# Altium PCB pcb_out.PcbDoc
Units mil, origin at the board's own origin, x right, y up, seen from the top; angles counter-clockwise.
Board outline 4251.97 x 2480.32 mil, 2 copper layers (Top Layer, Bottom Layer); 14 components, 14 nets, 56 pads, 0 vias.
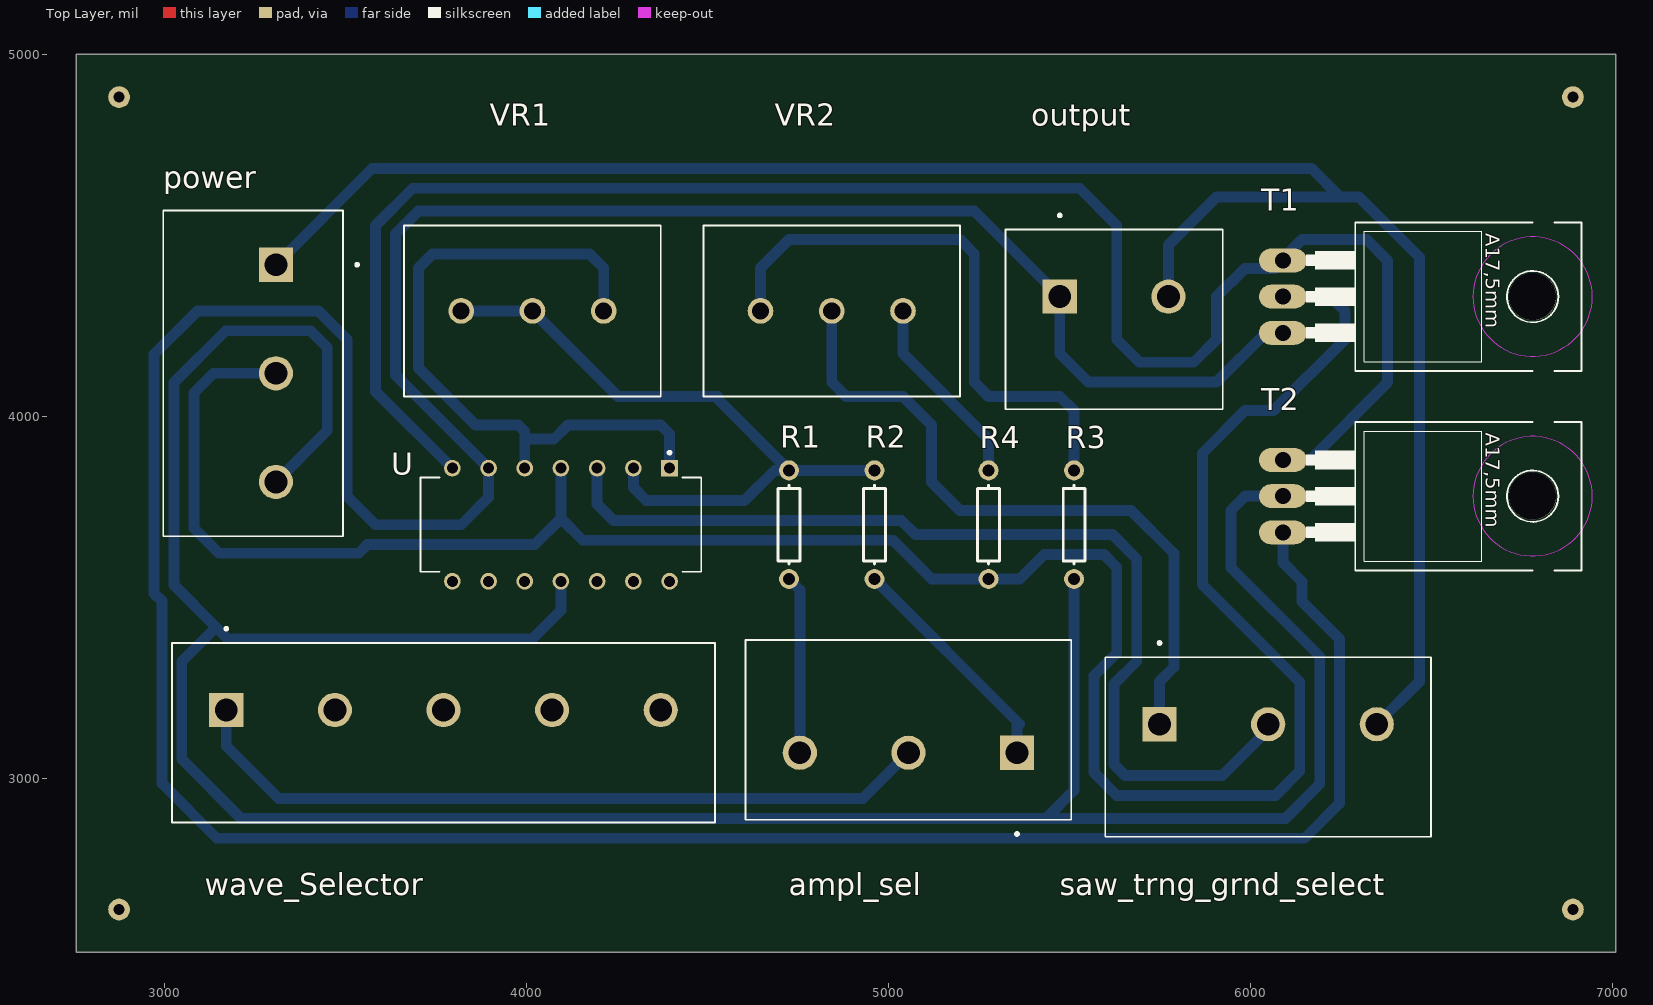
[diagram p0: Top Layer view]
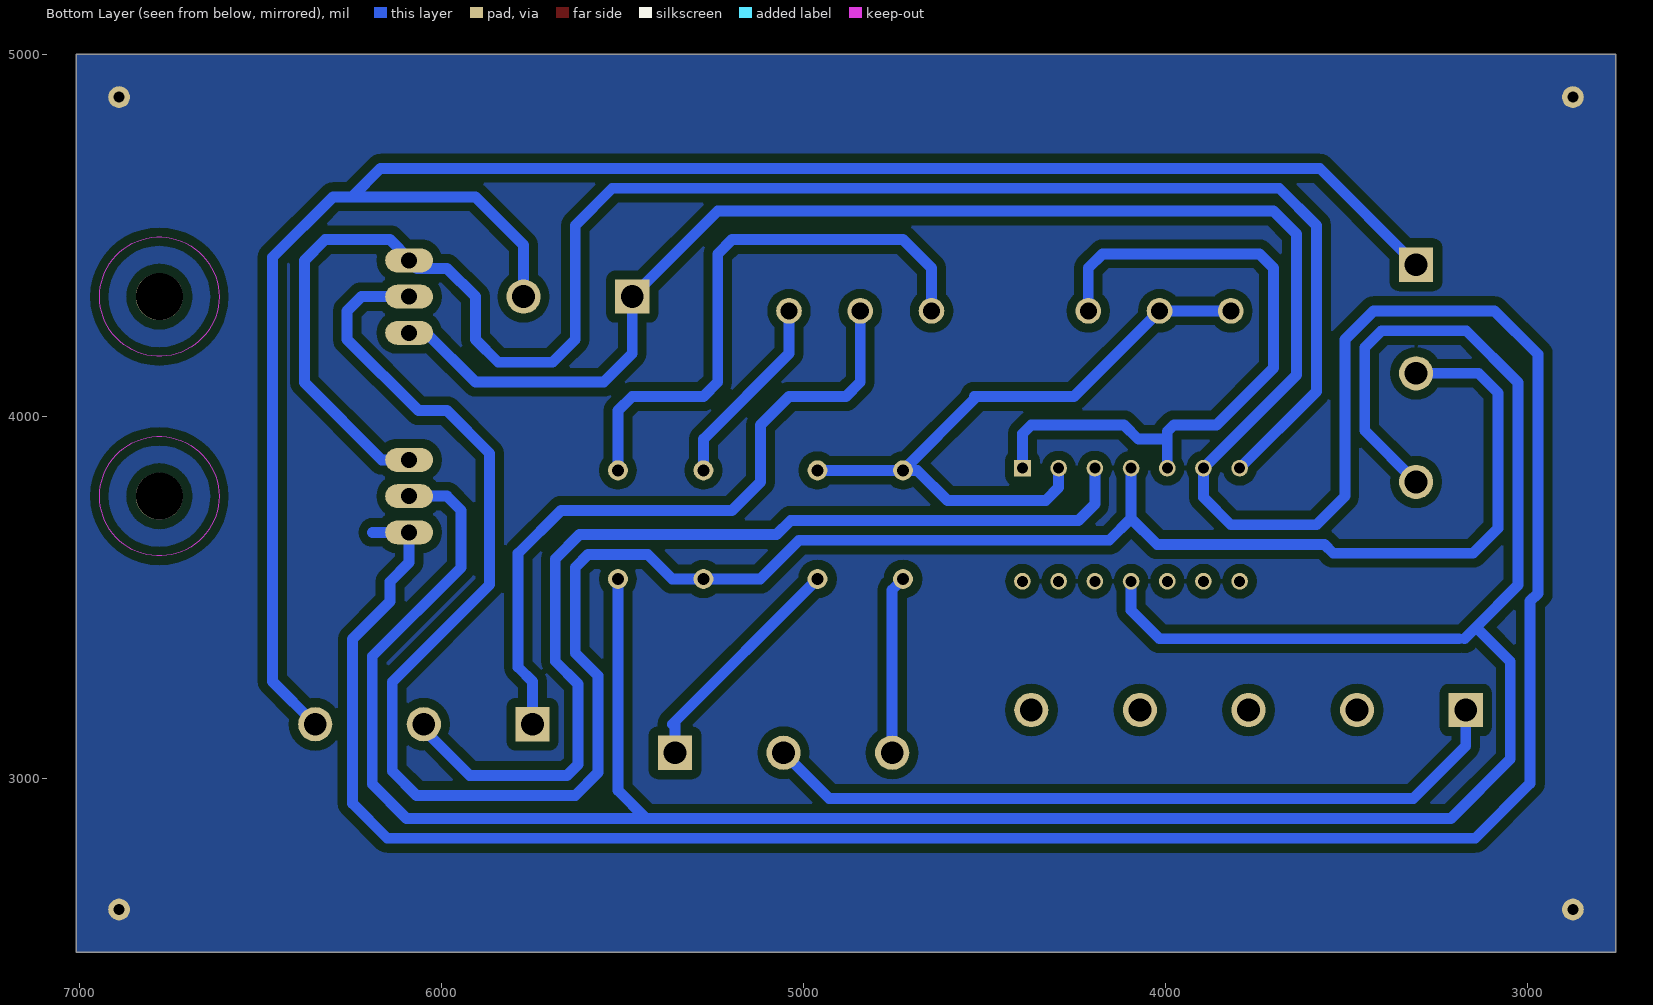
[diagram p1: Bottom Layer view, seen from below]

## Layer stack, top to bottom
Top Solder: solder mask 0.4, Solder Resist, Dk 3.5
Top Layer: signal copper 1.4
Dielectric 1: dielectric 12.6, FR-4, Dk 4.8
Bottom Layer: signal copper 1.4
Bottom Solder: solder mask 0.4, Solder Resist, Dk 3.5

## Board outline
2755.91,5000 7007.87,5000 7007.87,2519.68 2755.91,2519.68

## Design rules (kind name [scope] priority, off if disabled: settings)
Clearance [All] p1: gap=25 ignorepadtopadclearanceinfootprint=FALSE except(0: Arc-Hole Track-Hole SMDPad-Hole THPad-Hole Via-Hole Fill-Hole Poly-Hole Region-Hole Text-Hole)
PolygonConnect [All] p1: connectstyle=Relief reliefconductorwidth=10 reliefentries=4 polygonreliefangle="90 Angle" airgapwidth=10
RoutingLayers [All] p1: top layer_v5=FALSE bottom layer_v5=TRUE
RoutingVias [All] p1: holewidth=28 width=50 viastyle="Through Hole" minholewidth=28 minwidth=50 maxholewidth=28 maxwidth=50
SolderMaskExpansion [All] p1: expansion=4 istentingtop=FALSE
Width [All] p1: maxlimit=35 minlimit=10 preferedwidth=30 toplayer_maxwidth=10 toplayer_prefwidth=10 bottomlayer_minwidth=25 minimp=50.000000 maximp=50.000000 favimp=50.000000
29 further rules are at their usual default settings.

## Components (designator, comment, footprint, x,y, rotation, side; value= is the part's Value field where it differs from the comment)
ampl_sel "TB005-762-03BE" CUI_TB005-762-03BE 5354.33,3070.87 r180 top
output "TB005-762-02BE" CUI_TB005-762-02BE 5472.44,4330.71 r0 top
power "Grn +vcc -vcc" CUI_TB005-762-03BE 3307.09,4418.9 r270 top
R1 "Res1" AXIAL-0.3 4724.41,3700.79 r90 top value=10K
R2 "Res1" AXIAL-0.3 4960.63,3700.79 r90 top value=1K
R3 "Res1" AXIAL-0.3 5511.81,3700.79 r90 top value=10K
R4 "Res1" AXIAL-0.3 5275.59,3700.79 r270 top value=10K
saw_trng_grnd_select "TB005-762-03BE" CUI_TB005-762-03BE 5748.03,3149.61 r0 top
T1 "TIP31C" TO220 6338.58,4330.71 r270 top
T2 "TIP32" TO220 6338.58,3779.53 r270 top
U "TL074CN" DIP794W45P254L1969H508Q14 4094.49,3700.79 r270 top
VR1 "10k" P160 4015.75,4291.34 r180 top
VR2 "100K" P160 4842.52,4291.34 r180 top
wave_Selector "TB005-762-05BE" CUI_TB005-762-05BE 3170.08,3188.98 r0 top

## Footprints (in the part's own frame and the unit in brackets; to place one, negate y for a bottom-side part, rotate by r counter-clockwise, add the part's x,y. Pads: shape width x height; smd on the part's side, far side on the other; paste and mask are expansions set on the pad)
AXIAL-0.3 [mm] "Axial Device, Thru-Hole; 2 Leads; 0.3 in Pin Spacing"
  round 1.4 hole 0.85: 1(-3.81,0) 2(3.81,0)
  silkscreen extent -2.77,-0.76 2.77,0.76
CUI_TB005-762-02BE [mm]
  rect 2.4x2.4 hole 1.6: 1(0,0)
  round 2.4 hole 1.6: 2(7.62,0)
  silkscreen extent -3.81,-7.9 11.43,5.8
CUI_TB005-762-03BE [mm]
  rect 2.4x2.4 hole 1.6: 1(0,0)
  round 2.4 hole 1.6: 2(7.62,0) 3(15.24,0)
  silkscreen extent -3.81,-7.9 19.05,5.8
CUI_TB005-762-05BE [mm]
  rect 2.4x2.4 hole 1.6: 1(0,0)
  round 2.4 hole 1.6: 2(7.62,0) 3(15.24,0) 4(22.86,0) 5(30.48,0)
  silkscreen extent -3.81,-7.9 34.29,5.8
DIP794W45P254L1969H508Q14 [mm]
  rect 1.17x1.17 hole 0.77: 1(-3.97,7.62)
  round 1.17 hole 0.77: 2(-3.97,5.08) 3(-3.97,2.54) 4(-3.97,0) 5(-3.97,-2.54) 6(-3.97,-5.08) 7(-3.97,-7.62) 8(3.97,-7.62) 9(3.97,-5.08) 10(3.97,-2.54) 11(3.97,0) 12(3.97,2.54) 13(3.97,5.08) 14(3.97,7.62)
  silkscreen extent -5.15,-9.84 3.3,9.84
P160 [mm]
  round 1.8 hole 1.2: 1(-5,0) 2(0,0) 3(5,0)
  silkscreen extent -9,-6 9,6
TO220 [mil]
  oval 66x132 hole 44: 1(-100,-250) 2(0,-250) 3(100,-250)
  round 130 hole 130 unplated: ""(0,440)
  Keep-Out Layer circle w0: c0,440 r165
  Keep-Out Layer circle w0: c0,440 r165
  silkscreen extent -205,-185 205,575

## Part data
ampl_sel output saw_trng_grnd_select: "2~24 Poles, Screw Type, Horizontal, 7.62 Pitch, 26~10 _AWG_, Terminal Block Connector", Package=None, Availability=Unavailable, MF="CUI Devices", Price=None
  ampl_sel saw_trng_grnd_select: CUI_purchase_URL=https://www.cuidevices.com/product/interconnect/connectors/terminal-blocks/tb005-762-series?utm_source=snapeda.com&utm_medium=referral&utm_campaign=snapedaBOM, MP=TB005-762-03BE, SnapEDA_Link=https://www.snapeda.com/parts/TB005-762-03BE/CUI%20Devices/view-part/3590987/?ref=snap
  output: MP=TB005-762-02BE, SnapEDA_Link=https://www.snapeda.com/parts/TB005-762-02BE/CUI%20Devices/view-part/3590982/?ref=snap
power: library part TB005-762-03BE, "2~24 Poles, Screw Type, Horizontal, 7.62 Pitch, 26~10 _AWG_, Terminal Block Connector", Package=None, Availability=Unavailable, CUI_purchase_URL=https://www.cuidevices.com/product/interconnect/connectors/terminal-blocks/tb005-762-series?utm_source=snapeda.com&utm_medium=referral&utm_campaign=snapedaBOM, MF="CUI Devices", MP=TB005-762-03BE, Price=None, SnapEDA_Link=https://www.snapeda.com/parts/TB005-762-03BE/CUI%20Devices/view-part/3590987/?ref=snap
R1 R2 R3 R4: "Resistor", LatestRevisionDate=17-Jul-2002, LatestRevisionNote="Re-released for DXP Platform.", PackageDescription="Axial Device, Thru-Hole; 2 Leads; 0.3 in Pin Spacing", PackageReference=AXIAL-0.3, Published=8-Jun-2000, Publisher="Altium Limited"
T1: "Bipolar _BJT_ Transistor NPN 100V 3A 3MHz 2W Through Hole TO-220AB", Package="TO-220 Multicomp", Availability=Unavailable, MF="Renesas Electronics", MP=TIP31C, Price=None, SnapEDA_Link=https://www.snapeda.com/parts/TIP31C/Renesas%20Electronics%20America%20Inc./view-part/1915707/?ref=snap
T2: "Bipolar _BJT_ Transistor PNP 40V 3A 3MHz 2W Through Hole TO-220-3", Package="TO-220 ON Semiconductor", Availability=Unavailable, MF="ON Semiconductor", MP=TIP32, Price=None, SnapEDA_Link=https://www.snapeda.com/parts/TIP32/ON%20Semiconductor/view-part/4572277/?ref=snap
U: "Quad Low-Noise JFET-Input General-Purpose Operational Amplifier 14-PDIP 0 to 70", Package="PDIP-14 Texas Instruments", Availability=Good, DigiKey-Purchase-URL=https://snapeda.com/shop?store=DigiKey&id=4796371, MF="Texas Instruments", Mouser-Purchase-URL=https://snapeda.com/shop?store=Mouser&id=4796371, MP=TL074CN, Price=None, SnapEDA_Link=https://www.snapeda.com/parts/TL074CN/Texas%20Instruments/view-part/4796371/?ref=snap, Texas_Instruments-Purchase-URL=https://snapeda.com/shop?store=Texas+Instruments&id=4796371
VR1 VR2: library part P160KN-0QC15B500K, "500k Ohm 1 Gang Linear Panel Mount Potentiometer None 1 Turn Conductive Plastic 0.2W, 1/5W PC Pins", Package=None, Digi-Key_Part_Number=987-1304-ND, Digi-Key_Purchase_URL=https://www.digikey.cz/product-detail/en/tt-electronics-bi/P160KN-0QC15B500K/987-1304-ND/2408881?utm_source=snapeda&utm_medium=aggregator&utm_campaign=symbol, MF="TT Electronics/BI", MP=P160KN-0QC15B500K, SnapEDA_Link=https://www.snapeda.com/parts/P160KN-0QC15B500K/TT%20Electronics/BI/view-part/903272/?ref=snap
wave_Selector: "2~24 Poles, Screw Type, Horizontal, 7.62 Pitch, 26~10 (AWG), Terminal Block Connector", Package=None, Availability=Unavailable, Check_prices=https://www.snapeda.com/parts/TB005-762-05BE/CUI%20Devices/view-part/3590997/?ref=eda, CUI_purchase_URL=https://www.cuidevices.com/product/interconnect/connectors/terminal-blocks/tb005-762-series?utm_source=snapeda.com&utm_medium=referral&utm_campaign=snapedaBOM, MF="CUI Devices", MP=TB005-762-05BE, Price=None, SnapEDA_Link=https://www.snapeda.com/parts/TB005-762-05BE/CUI%20Devices/view-part/3590997/?ref=snap

## Free pads (board coordinates)
  round 60 hole 30: 6(2874.02,4881.89) 7(6889.76,4881.89) 8(6889.76,2637.8) 9(2874.02,2637.8)

## Nets (pads, with @x,y where several pads share a name; then routed paths per layer and width w, separated by ;. In a path a pad name is that pad's centre, name@x,y a point inside that pad or via, vN(x,y) a via of type N, cw(c..) or ccw(c..) an arc to the next point about the centre after c; other vN are vias at no path point)
Netampl_sel_1: ampl_sel.1 R2.1 | length 653.6
  Bottom Layer w30: R2.1 5361.81,3149.61 5354.33,3149.61 ampl_sel.1
Netampl_sel_2: ampl_sel.2 wave_Selector.1 | length 2095.9
  Bottom Layer w30: wave_Selector.1 3170.08,3089.76 3315.2,2944.65 4928.11,2944.65 ampl_sel.2
Netampl_sel_3: ampl_sel.3 R1.1 | length 492.3
  Bottom Layer w30: R1.1 4754.33,3520.87 ampl_sel.3
Netoutput_1: output.1 T1.3 T2.3 U.6 | length 10622.4
  Bottom Layer w30: T1.3 6041.73,4230.71 5905.51,4094.49 5551.18,4094.49 5472.44,4173.23 output.1 5236.22,4566.93 3700.79,4566.93 3637.68,4503.82 3637.68,4113.9 U.6 3894.49,3776.38 3818.9,3700.79 3582.68,3700.79 3503.94,3779.53 3503.94,4212.6 3425.2,4291.34 3090.6,4291.34 2970.74,4171.48 2970.74,3510.96 2992.13,3489.57 2992.13,2986.35 3143.83,2834.65 6148.91,2834.65 6245.37,2931.11 6245.37,3384.86 6141.73,3488.5 6141.73,3543.31 6088.58,3596.46 T2.3 6189.37,3679.53
Netoutput_2: output.2 power.1 saw_trng_grnd_select.3 | length 5381.2
  Bottom Layer w30: power.1 3573.3,4685.11 6167.37,4685.11 6246.18,4606.3 ; output.2 5772.44,4473.23 5905.51,4606.3 6246.18,4606.3 ; saw_trng_grnd_select.3 6466.14,3267.72 6466.14,4439.37 6299.21,4606.3 6246.18,4606.3
Netpower_2: power.2 R4.2 T1.2 U.4 | length 6486.4
  Bottom Layer w30: power.2 3134.65,4118.9 3080.74,4064.99 3080.74,3690.92 3149.61,3622.05 3536.16,3622.05 3559.9,3645.79 4022.17,3645.79 4094.49,3718.11 ; U.4 4094.49,3718.11 ; T1.2 6220.47,4330.71 6259.84,4291.34 6259.84,4212.6 6062.99,4015.75 5984.25,4015.75 5866.14,3897.64 5866.14,3535.34 6135.37,3266.11 6135.37,3020.11 6068.02,2952.76 5629.92,2952.76 5566.81,3015.87 5566.81,3283.35 5629.92,3346.46 5629.92,3582.68 5594.25,3618.35 5429.37,3618.35 5361.81,3550.79 R4.2 5118.69,3550.79 5011.76,3657.72 4154.88,3657.72 4094.49,3718.11
Netpower_3: power.3 R3.1 T2.2 U.11 | length 8082.9
  Bottom Layer w30: 3173.65,3385.83 3141.94,3417.54 ; 3188.98,3385.83 4015.75,3385.83 4094.49,3464.57 U.11 ; power.3 3448.94,3960.75 3448.94,4189.82 3402.42,4236.34 3168.6,4236.34 3025.74,4093.48 3025.74,3533.74 3141.94,3417.54 ; R3.1 5511.81,2967.01 5434.45,2889.65 ; T2.2 5984.25,3779.53 5944.88,3740.16 5944.88,3582.68 6190.37,3337.19 6190.37,2984.11 6095.91,2889.65 5434.45,2889.65 ; 3141.94,3417.54 3047.13,3322.72 3047.13,3053.35 3210.83,2889.65 5434.45,2889.65
NetR1_2: R1.2 R2.2 U.2 VR1.2 VR1.3 | length 1861.5
  Bottom Layer w30: VR1.3 VR1.2 4251.97,4055.12 4527.56,4055.12 4527.56,4047.64 R1.2 ; U.2 4294.49,3803.3 4330.07,3767.72 4601.97,3767.72 4685.04,3850.79 R1.2 ; R2.2 R1.2
NetR3_2: R3.2 VR2.3 | length 1585.1
  Bottom Layer w30: VR2.3 4645.67,4409.45 4724.41,4488.19 5196.85,4488.19 5236.22,4448.82 5236.22,4094.49 5275.59,4055.12 5472.44,4055.12 5511.81,4015.75 R3.2
NetR4_1: R4.1 VR2.1 | length 538.4
  Bottom Layer w30: VR2.1 5039.37,4173.23 5275.59,3937.01 R4.1
Netsaw_trng_grnd_select_1: saw_trng_grnd_select.1 VR2.2 | length 1918.4
  Bottom Layer w30: VR2.2 4842.52,4094.49 4881.89,4055.12 5039.37,4055.12 5118.11,3976.38 5118.11,3818.9 5196.85,3740.16 5669.29,3740.16 5787.4,3622.05 5787.4,3307.09 5748.03,3267.72 saw_trng_grnd_select.1
Netsaw_trng_grnd_select_2: saw_trng_grnd_select.2 U.3 | length 2752.6
  Bottom Layer w30: U.3 4194.49,3758.27 4240.04,3712.72 5034.54,3712.72 5073.91,3673.35 5617.99,3673.35 5684.92,3606.42 5684.92,3323.68 5621.81,3260.57 5621.81,3038.65 5652.7,3007.76 5921.14,3007.76 6048.03,3134.65 saw_trng_grnd_select.2
NetT1_1: T1.1 T2.1 U.7 | length 4930.8
  Bottom Layer w30: U.7 3582.68,4068.9 3582.68,4527.56 3685.23,4630.11 5527.37,4630.11 5629.92,4527.56 5629.92,4212.6 5693.03,4149.49 5842.4,4149.49 5905.51,4212.6 5905.51,4330.71 5983.66,4408.85 6066.72,4408.85 T1.1 6088.58,4435.04 6141.73,4488.19 6320.47,4488.19 6377.95,4430.71 6377.95,4093.11 6164.37,3879.53 T2.1
NetU_1: U.1 U.5 VR1.1 | length 1927
  Bottom Layer w30: U.5 3994.49,3937.01 ; VR1.1 4212.6,4409.45 4173.23,4448.82 3740.16,4448.82 3700.79,4409.45 3700.79,4133.86 3858.27,3976.38 3976.38,3976.38 3994.49,3958.27 3994.49,3937.01 ; U.1 4394.49,3951.97 4370.08,3976.38 4113.78,3976.38 4074.41,3937.01 3994.49,3937.01
pads on no net: T1. T2. U.8 U.9 U.10 U.12 U.13 U.14 wave_Selector.2 wave_Selector.3 wave_Selector.4 wave_Selector.5

## Polygon pours and split planes (outlines as drawn)
no net on Bottom Layer "Bottom Layer-No Net" (solid, pour order 0): 2755.91,5000 7007.87,5000 7007.87,2519.68 2755.91,2519.68

## Silkscreen, mask and mechanical layers (free items; w line width, h text height)
board outline:
  the board outline again, w39.37

## Text inside footprints (layer, text, board x,y; h text height)
T1: Top Overlay "A17,5mm" at 6648.65,4505.75 h39.01 r270; Mechanical 13 "3" at 6338.58,4255.62 h50.06 r270; Mechanical 13 "2" at 6338.58,4355.72 h50.03 r270; Mechanical 13 "1" at 6338.58,4455.94 h50.09 r270
T2: Top Overlay "A17,5mm" at 6648.96,3954.74 h39.05 r270; Mechanical 13 "3" at 6338.58,3704.39 h50.09 r270; Mechanical 13 "2" at 6338.58,3804.57 h50.08 r270; Mechanical 13 "1" at 6338.58,3904.63 h50.04 r270